# Altium PCB RP2040_PCB.PcbDoc
Units mm, origin at the board's own origin, x right, y up, seen from the top; angles counter-clockwise.
Board outline 57.7 x 53.5 mm, 4 copper layers (Top Layer, GND, Power, Bottom Layer), stack 0.841 mm thick; 30 components, 51 nets, 206 pads, 55 vias.
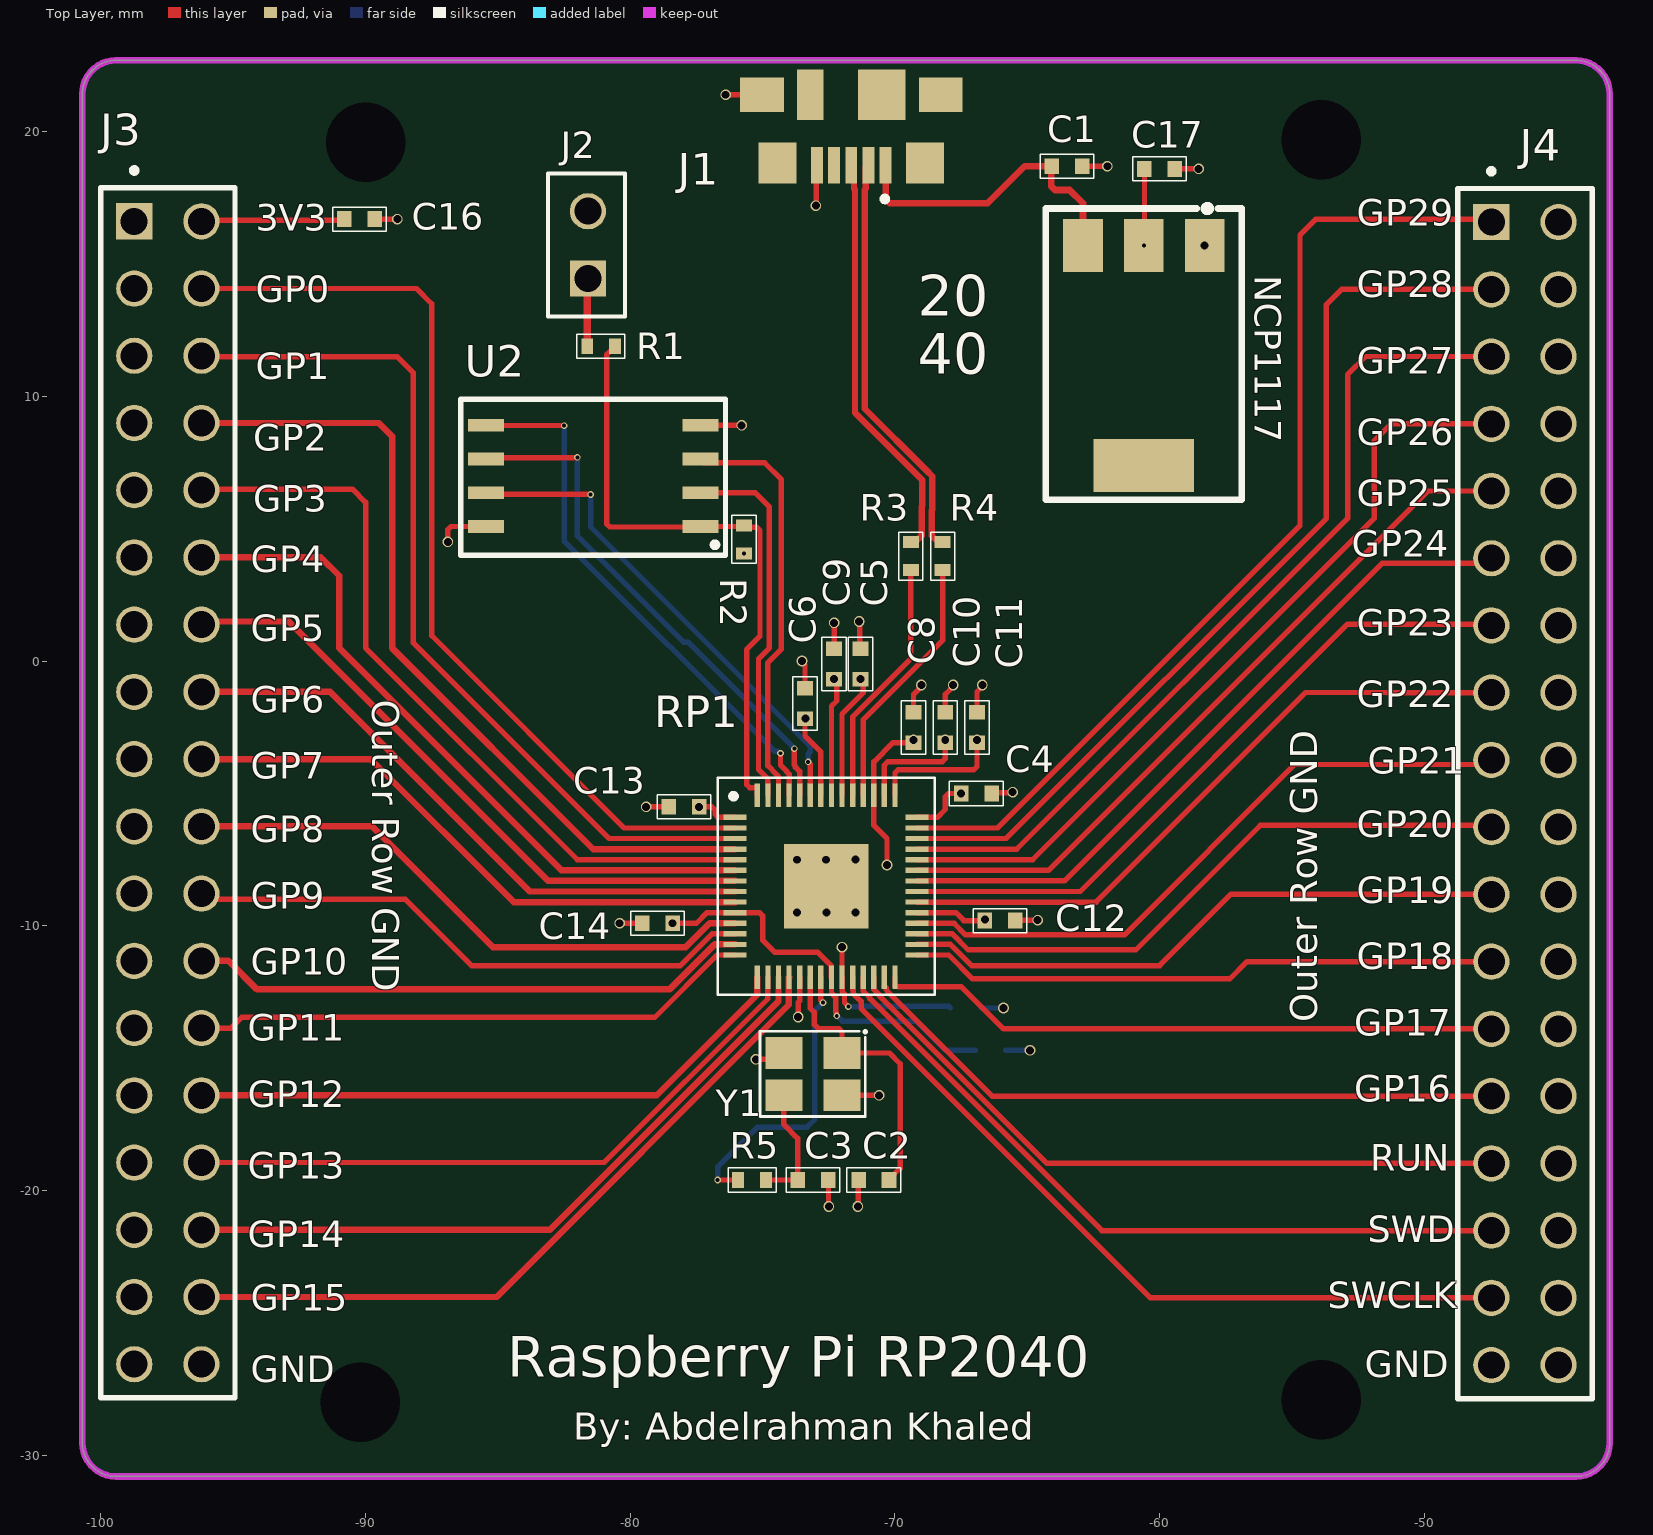
[diagram p0: Top Layer view]
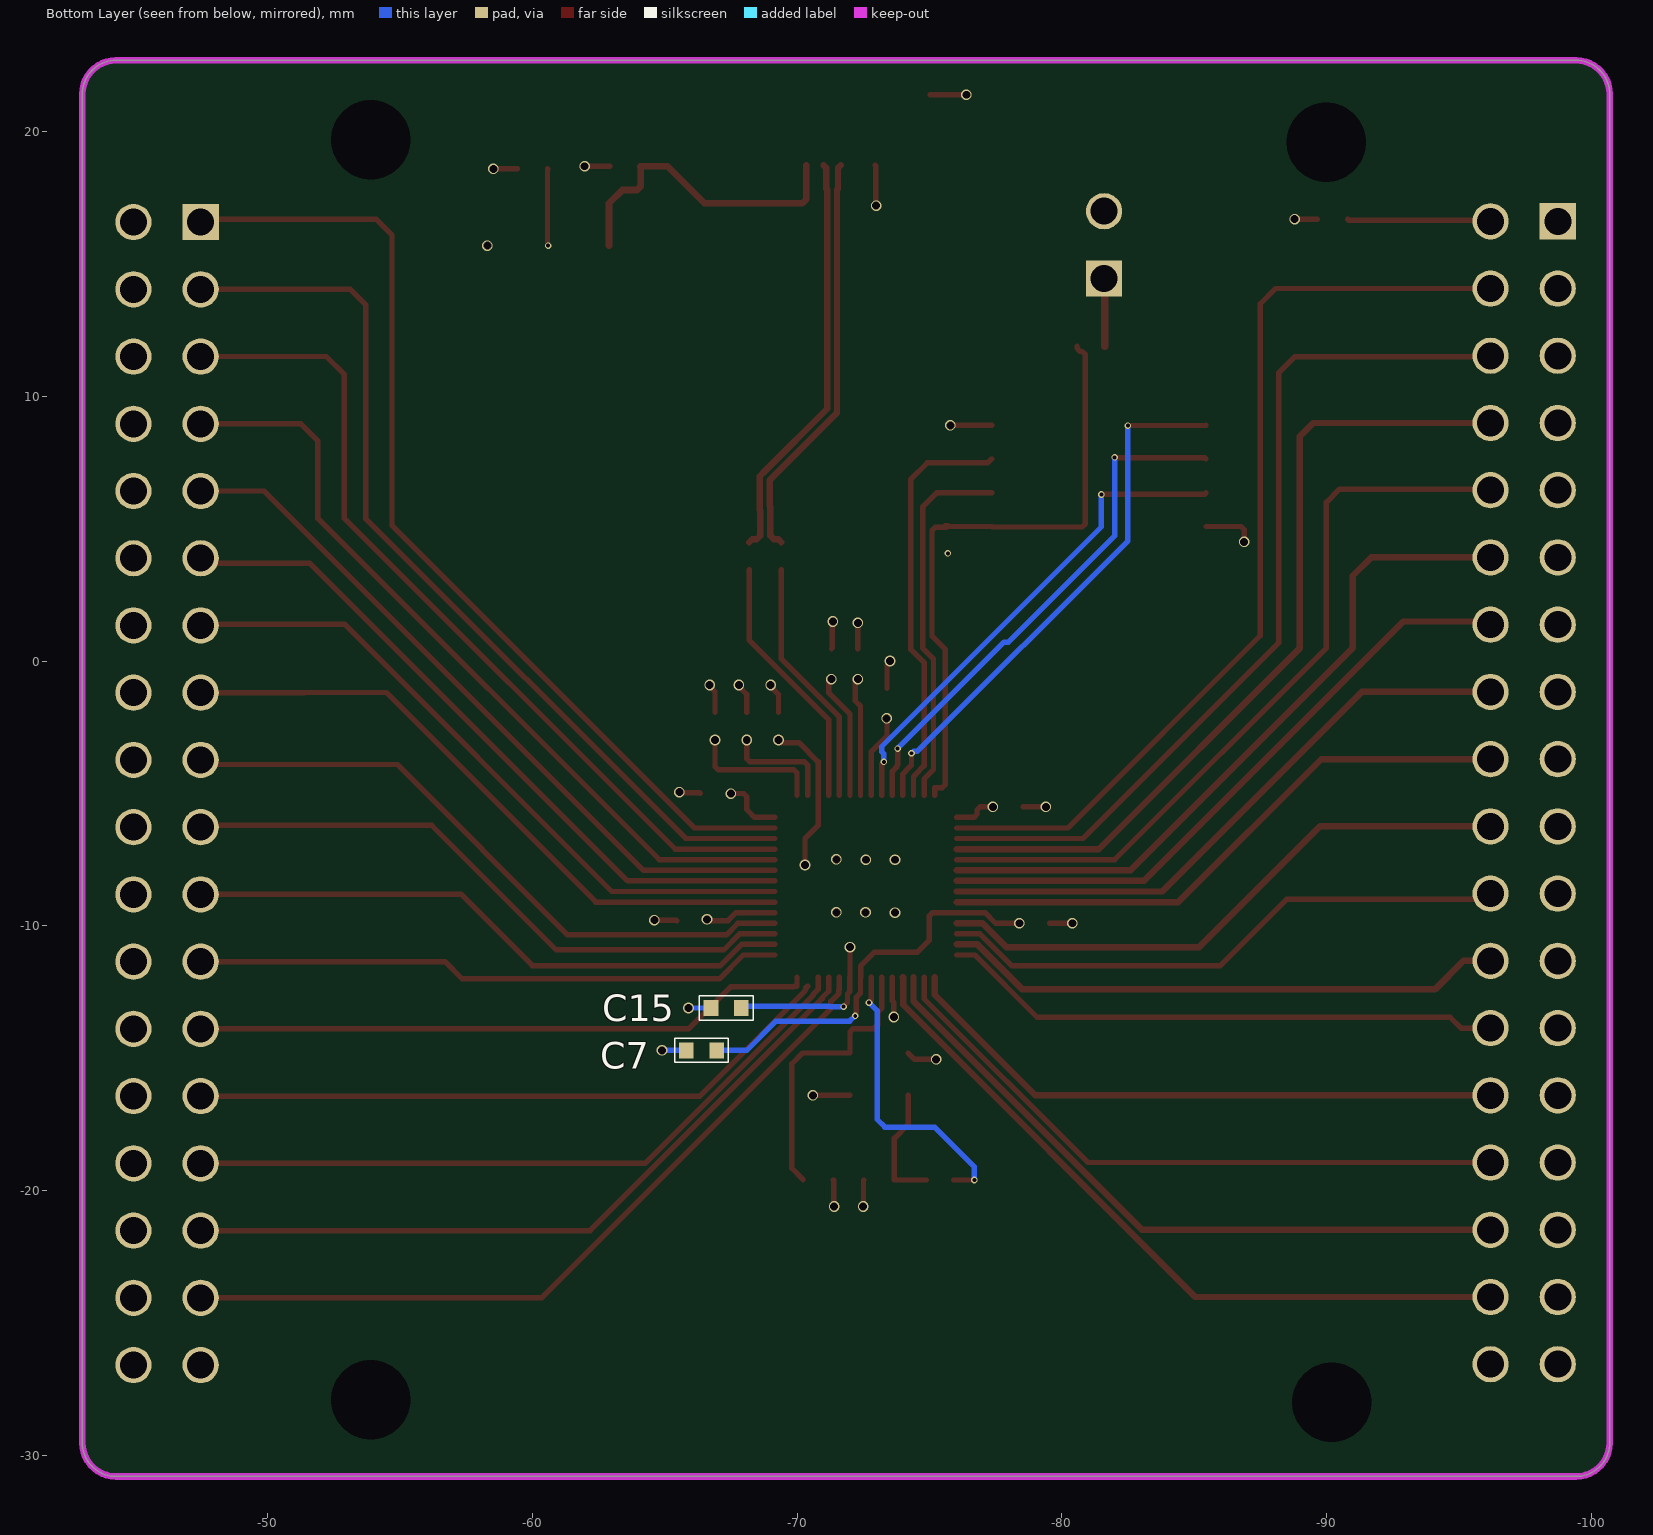
[diagram p1: Bottom Layer view, seen from below]
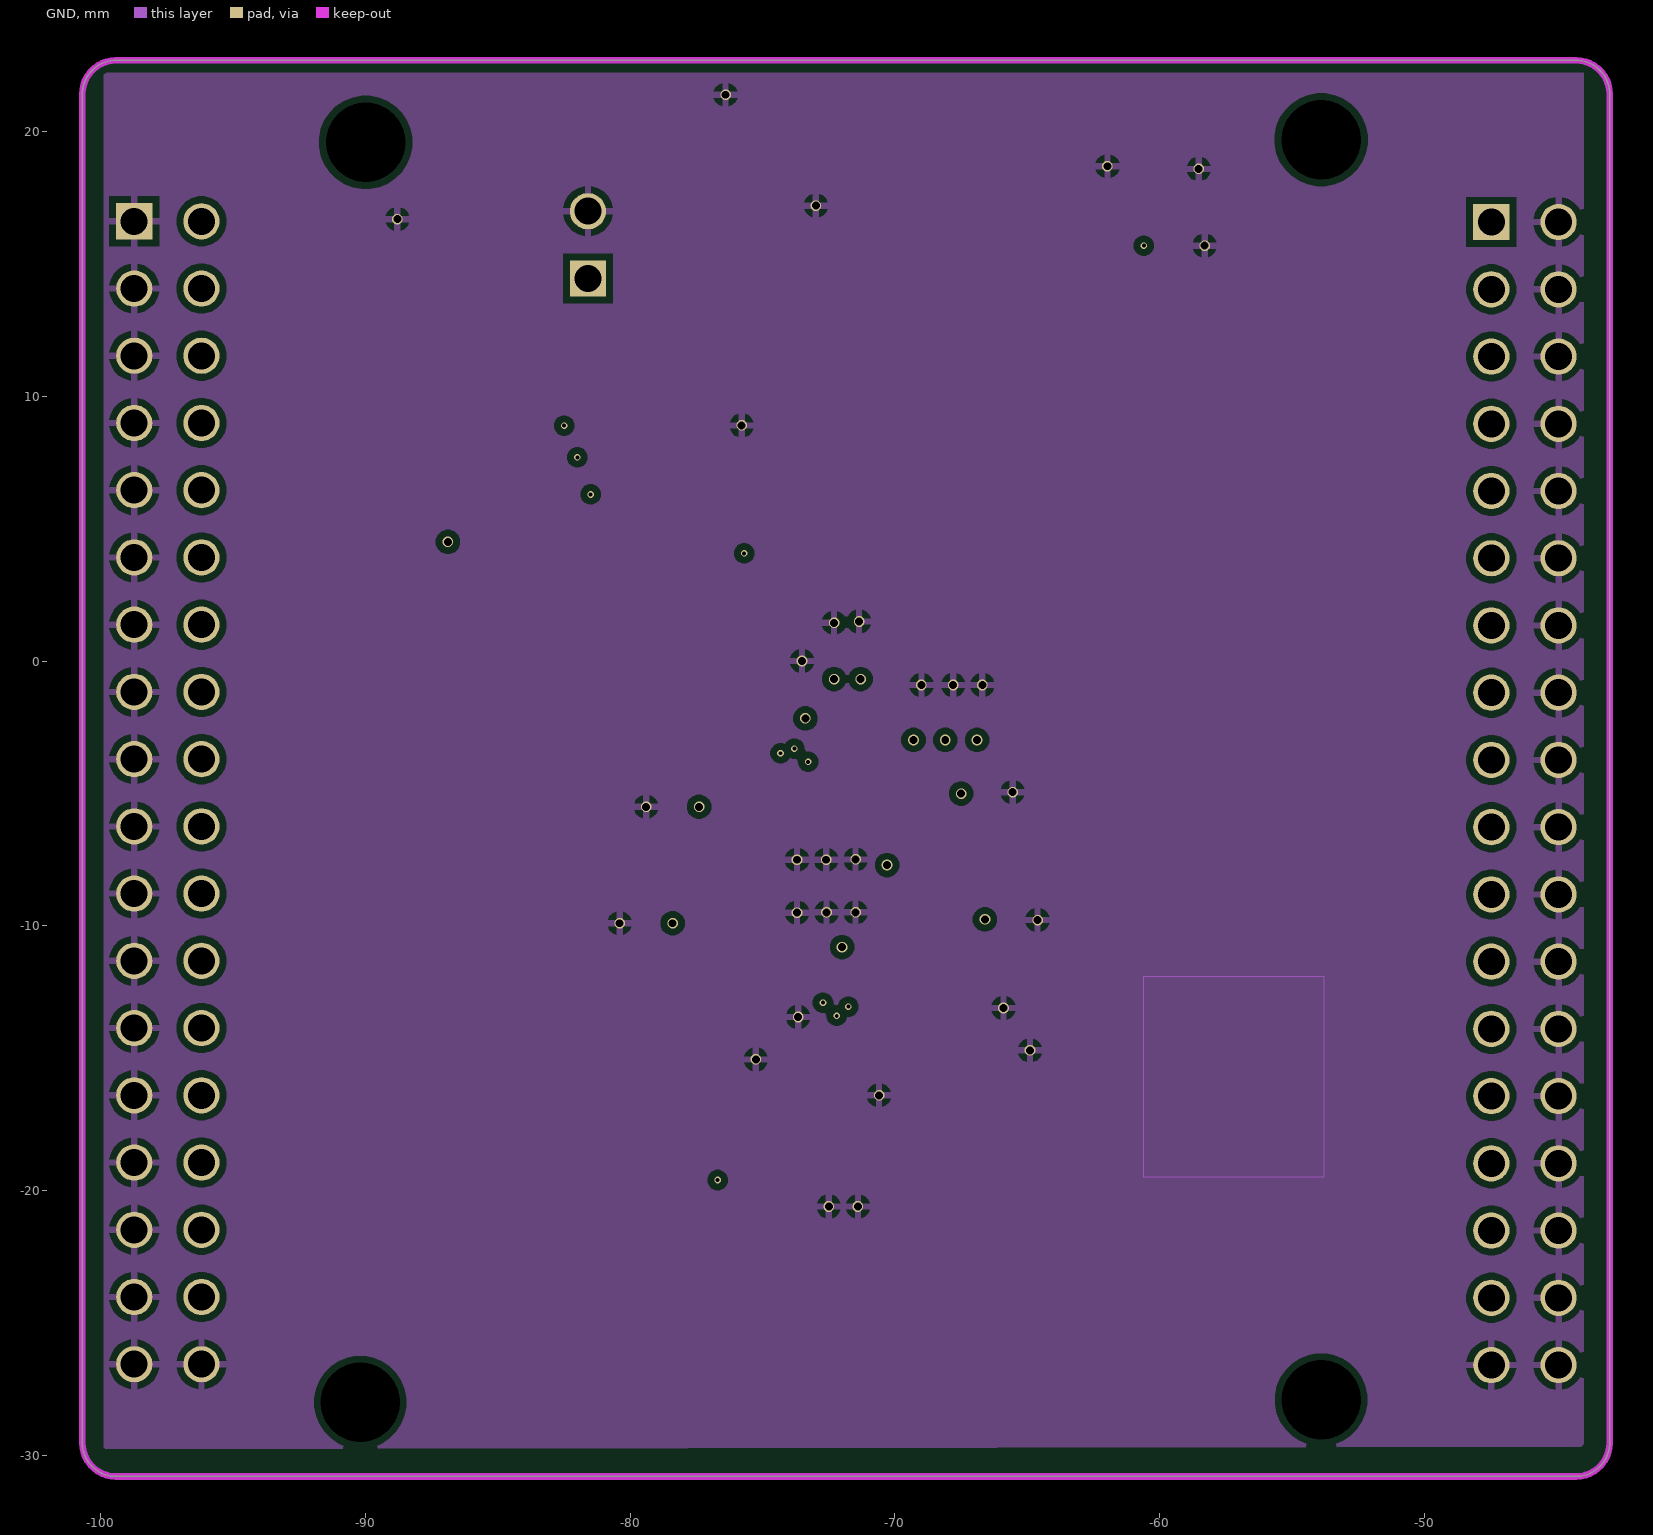
[diagram p2: GND]
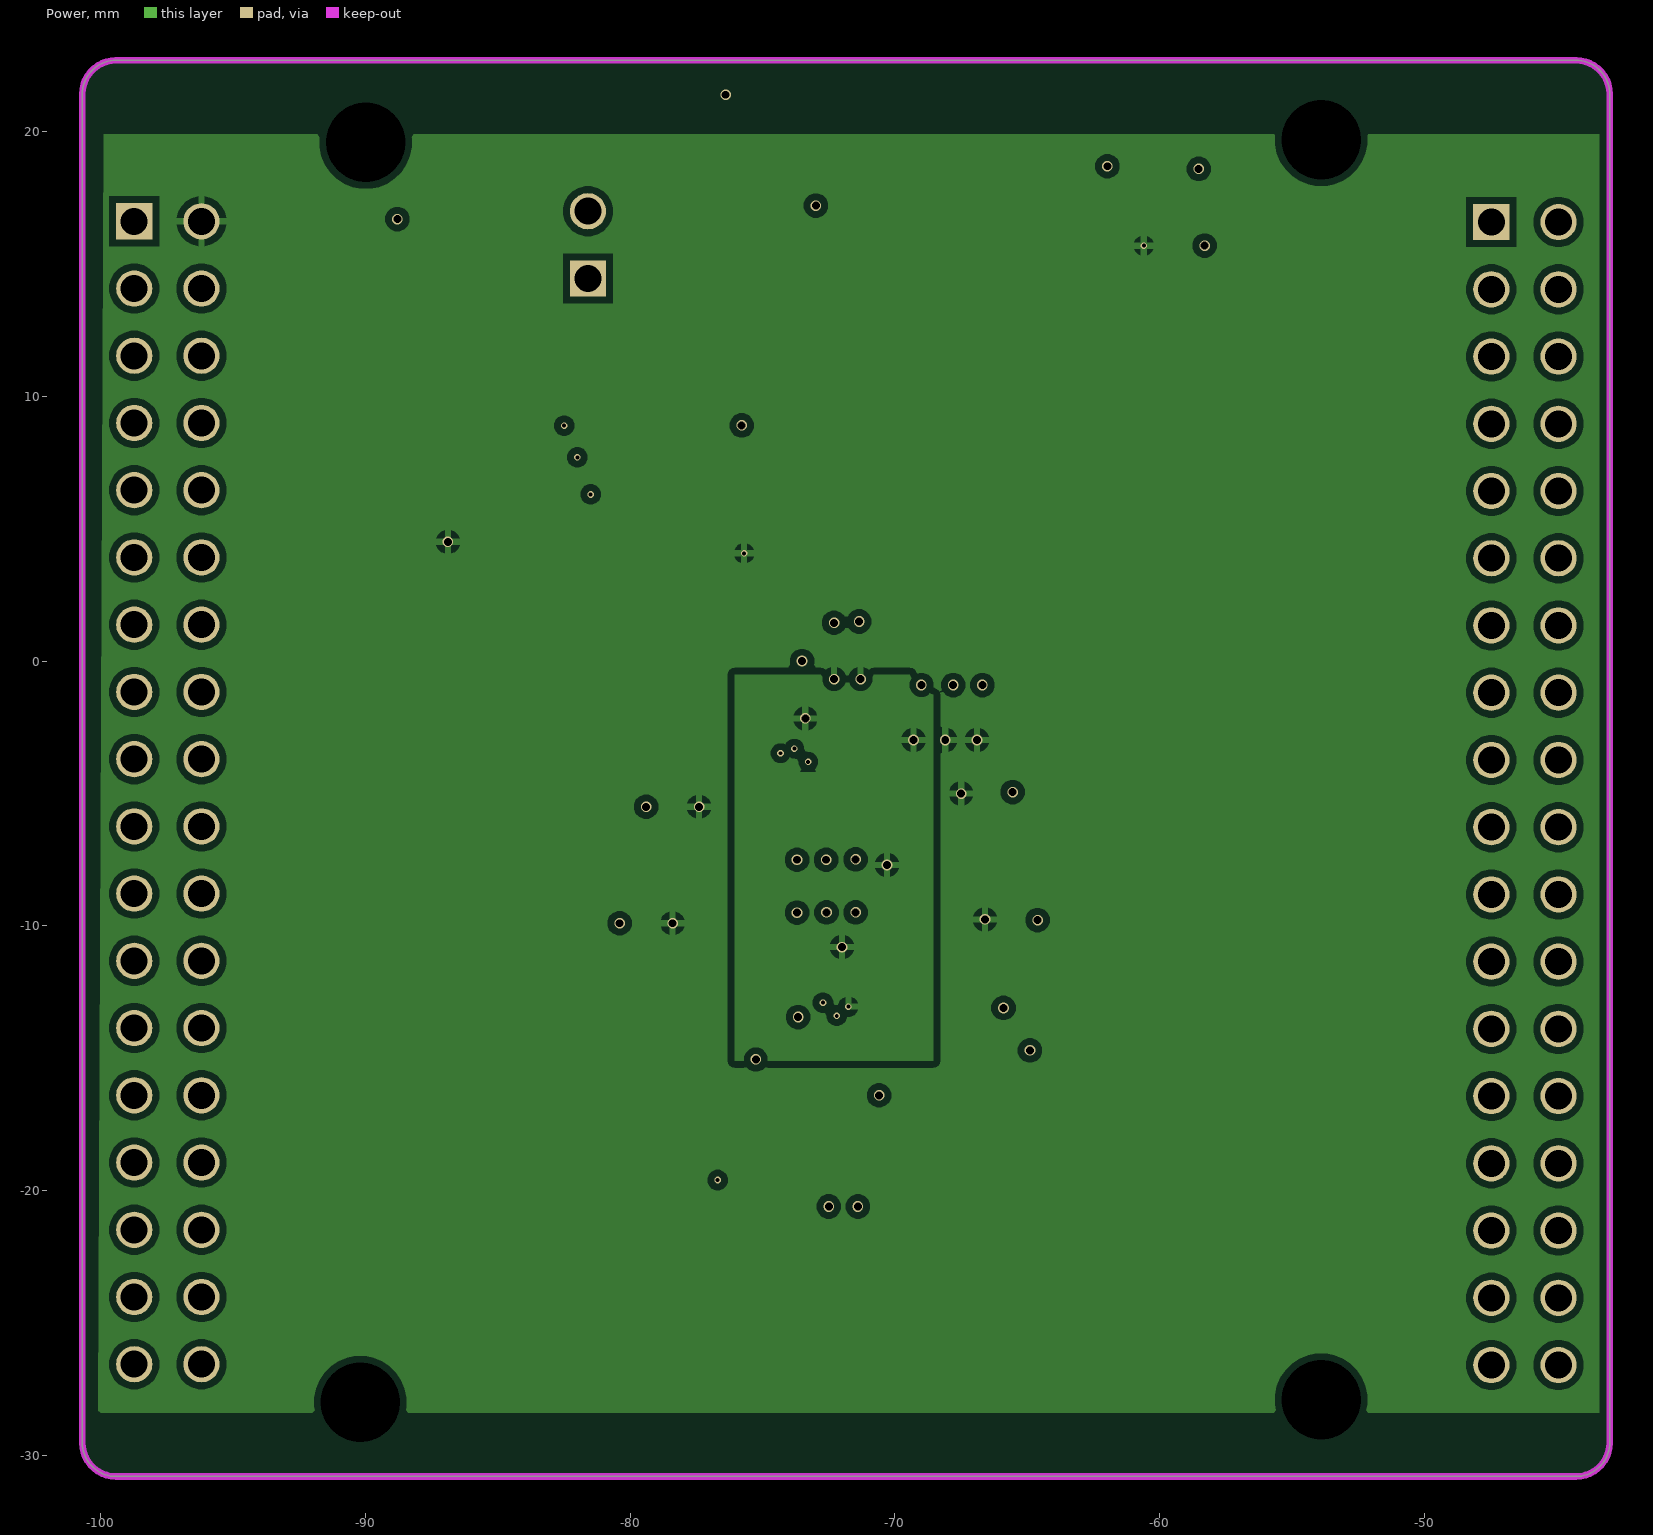
[diagram p3: Power]
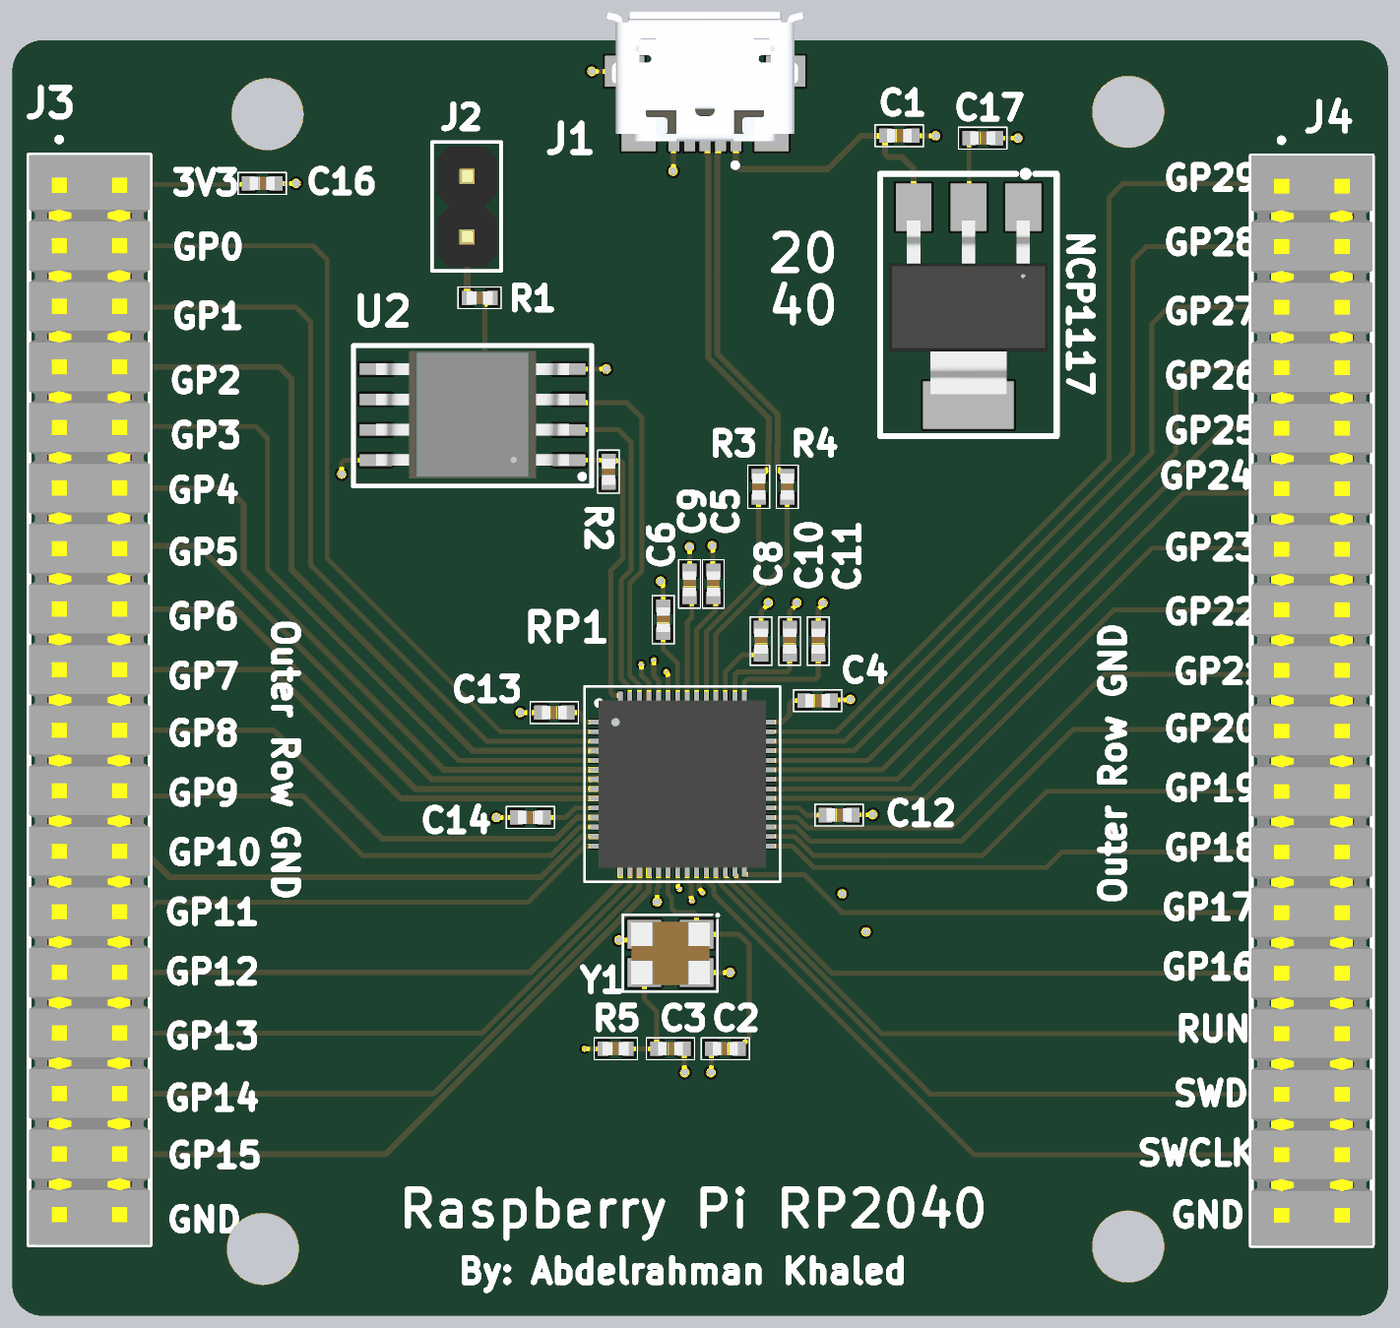
[diagram p4: 3D render of the assembled board from above, using the file's embedded part models]

## Layer stack, top to bottom
Top Solder: solder mask 0.0102, Solder Resist, Dk 3.5
Top Layer: signal copper 0.035
Dielectric 2: prepreg 0.2104, PP-021, Dk 4.4
GND: signal copper 0.0152
Dielectric 1: dielectric 0.32, FR-4, Dk 4.8
Power: signal copper 0.0152
Dielectric 3: prepreg 0.2104, PP-021, Dk 4.4
Bottom Layer: signal copper 0.035
Bottom Solder: solder mask 0.0102, Solder Resist, Dk 3.5

## Board outline
-100.7,-29.53 -100.7,20.2 -100.7,21.43 cw(c-99.43,21.43) -99.43,22.7 -44.27,22.7 cw(c-44.27,21.43) -43,21.43 -43,-29.53 cw(c-44.27,-29.53) -44.27,-30.8 -99.43,-30.8 cw(c-99.43,-29.53)

## Design rules (kind name [scope] priority, off if disabled: settings)
Clearance [All] p1: gap=0.254 ignorepadtopadclearanceinfootprint=FALSE except(0.1: Arc-SMDPad Track-SMDPad; 0.127: Arc-Arc Arc-Track Track-Track; 0.19: SMDPad-SMDPad)
DiffPairsRouting [InDifferentialPairClass('DIF 90')] p1: maxlimit=0.127 minlimit=0.127 mostfreqgap=0.127 toplayer_minwidth=0.243 toplayer_maxwidth=0.243 toplayer_prefwidth=0.243 midlayer1_minwidth=0.142 midlayer1_maxwidth=0.142 midlayer1_prefwidth=0.142 midlayer2_minwidth=0.142 midlayer2_maxwidth=0.142 midlayer2_prefwidth=0.142 bottomlayer_minwidth=0.243 bottomlayer_maxwidth=0.243 bottomlayer_prefwidth=0.243 impedanceprofiledriven=TRUE impedanceprofileid={6ACBEE60-41A3-47DC-9B99-EDC9D00B49B0} impedanceprofilevalue=90.000000 maxuncoupledlength=12.7
HoleSize [All] p1: absolutevalues=TRUE maxlimit=5 minlimit=0.025 maxpercent=80.000 minpercent=20.000
MinimumSolderMaskSliver [All] p1: minsoldermaskwidth=0.1
PolygonConnect [All] p1: connectstyle=Relief reliefconductorwidth=0.254 reliefentries=4 polygonreliefangle="90 Angle" airgapwidth=0.254
RoutingVias [All] p1: holewidth=0.5 width=0.4 viastyle="Through Hole" minholewidth=0.15 minwidth=0.25 maxholewidth=0.6 maxwidth=0.5
SilkToSilkClearance [All] p1: silktosilkclearance=0.154
SilkToSolderMaskClearance [IsPad] p1: minsilkscreentomaskgap=0.1 clearancetoexposedcopper=TRUE
SolderMaskExpansion [All] p1: expansion=0.102 istentingtop=FALSE
Width Width_1 [All] p1: maxlimit=0.3 minlimit=0.1 preferedwidth=0.2 minimp=50.000000 maximp=50.000000 favimp=50.000000
Width USB_Width [InNetClass('DIF 90')] p2: maxlimit=0.254 minlimit=0.254 preferedwidth=0.254
25 further rules are at their usual default settings.

## Classes and differential pairs
differential pair class "DIF 90": USB
net class "DIF 90": USB_N USB_P
component class U_RP2040_Microcontroller: C6 C7 C8 C9 C10 C11 C12 C13 C14 C15 C16 J3 J4 R3 R4 RP1
component class "U_Power and Crystal": C1 C2 C3 J1 NCP1117 R5 Y1
component class "U_Flash Memory": C5 J2 R1 R2 U2
differential pair USB: +USB_P -USB_N

## Components (designator, comment, footprint, x,y, rotation, side; value= is the part's Value field where it differs from the comment)
C1 "10UF Capacitor" "CL21A106KOQNNNE - duplicate" -63.5,18.7 r180 top value=10UF
C2 "CAP CER 15PF 50V" "CAP CER 15PF 50V" -70.8,-19.6 r0 top
C3 "CAP CER 15PF 50V" "CAP CER 15PF 50V" -73.1,-19.6 r180 top
C4 "10UF Capacitor" "CL21A106KOQNNNE - duplicate" -66.925,-5 r180 top value=10UF
C5 "10UF Capacitor" CC0603KRX5R8BB104 -71.3,-0.1 r270 top value=100nF
C6 "100 nF" CC0603KRX5R8BB104 -73.4,-1.6 r270 top value=100nF
C7 "100 nF" CC0603KRX5R8BB104 -67.325,-13.1 r180 bottom value=100nF
C8 "1UF Cap" C0805C105K4RAC7800 -69.3,-2.5 r270 top value=1UF
C9 "100 nF" CC0603KRX5R8BB104 -72.3,-0.1 r270 top value=100nF
C10 "1UF Cap" C0805C105K4RAC7800 -68.1,-2.5 r270 top value=1UF
C11 "100 nF" CC0603KRX5R8BB104 -66.9,-2.5 r270 top value=100nF
C12 "100 nF" CC0603KRX5R8BB104 -66.025,-9.8 r180 top value=100nF
C13 "100 nF" CC0603KRX5R8BB104 -77.975,-5.5 r0 top value=100nF
C14 "100 nF" CC0603KRX5R8BB104 -78.975,-9.9 r0 top value=100nF
C15 "100 nF" CC0603KRX5R8BB104 -66.387,-14.7 r180 bottom value=100nF
C16 "100 nF" CC0603KRX5R8BB104 -90.225,16.7 r180 top value=100nF
C17 "10UF Capacitor" "CL21A106KOQNNNE - duplicate" -60,18.6 r180 top value=10UF
J1 "USB_B Micro" "USB_B Micro" -71.65,20.07 r180 top
J2 "Header 1x2" "Header 1x2" -81.8,15.63 r270 top
J3 "Header 2x18" "Header 2x18" -97.47,-4.97 r270 top
J4 "Header 2x18" "Header 2x18" -46.2,-5 r270 top
NCP1117 "IC REG LINEAR 3.3V 1A SOT223" NCP1117LPST33T3G -60.6,15.7 r180 top
R1 "1 KOhm" RC1206FR-078K06L -81.1,11.9 r0 top
R2 "1 KOhm" RC1206FR-078K06L -75.7,4.6 r270 top
R3 "27.4Ohm" RC1206FR-078K06L -69.4,3.975 r90 top
R4 "27.4Ohm" RC1206FR-078K06L -68.2,3.975 r90 top
R5 "1KOhm" RC1206FR-078K06L -75.4,-19.6 r180 top
RP1 "CortexM0" RaspberryPI2040 -72.6,-8.5 r0 top
U2 "W25Q128JVSIQ" W25Q128JVSIQ-ND -81.4,7 r180 top
Y1 "Crystal 12 MHz" "Crystal 12 MHz" -73.1,-15.6 r180 top

## Footprints (in the part's own frame and the unit in brackets; to place one, negate y for a bottom-side part, rotate by r counter-clockwise, add the part's x,y. Pads: shape width x height; smd on the part's side, far side on the other; paste and mask are expansions set on the pad)
C0805C105K4RAC7800 [mm] "1 µF ±10% 16V Ceramic Capacitor X7R 0805 (2012 Metric)"
  rect 0.55x0.6 smd: 1(-0.575,0) 2(0.575,0)
  silkscreen extent -1.01,-0.46 1.02,0.46, body extent -0.52,-0.28 0.52,0.28, height 0.56
"CAP CER 15PF 50V" [mm] "15 pF ±5% 50V Ceramic Capacitor C0G, NP0 0805 (2012 Metric) (https://www.digikey.com/en/products/detail/yageo/CC0805JRNPO9BN150/302835)"
  rect 0.55x0.6 smd: 1(-0.575,0) 2(0.575,0)
  silkscreen extent -1.01,-0.46 1.02,0.46, body extent -0.52,-0.28 0.52,0.28, height 0.56
CC0603KRX5R8BB104 [mm] "100 nF ±10% 16V Ceramic Capacitor X5R 0805 (2012 Metric)"
  rect 0.55x0.6 smd: 1(-0.575,0) 2(0.575,0)
  silkscreen extent -1.01,-0.46 1.02,0.46, body extent -0.52,-0.28 0.52,0.28, height 0.56
"CL21A106KOQNNNE - duplicate" [mm] "10 µF ±10% 16V Ceramic Capacitor X5R 0805 (2012 Metric)"
  rect 0.55x0.6 smd: 1(-0.575,0) 2(0.575,0)
  silkscreen extent -1.01,-0.46 1.02,0.46, body extent -0.52,-0.28 0.52,0.28, height 0.56
"Crystal 12 MHz" [mm] "12 MHz ±30ppm Crystal 18pF 150 Ohms 4-SMD, No Lead"
  rect 1.4x1.2 smd: 1(-1.1,-0.8) 2(1.1,-0.8) 3(1.1,0.8) 4(-1.1,0.8)
  silkscreen extent -1.98,-1.63 2,1.6, body extent -1.65,-1.32 1.65,1.32, height 0.76
"Header 1x2" [mm]
  rect 1.37x1.37 hole 1.02: 01(1.17,0.2)
  round 1.37 hole 1.02: 02(-1.37,0.2)
  silkscreen extent -2.8,-1.3 2.6,1.6, body extent -2.64,-1.1 2.44,1.44, height 8.54
"Header 2x18" [mm]
  rect 1.37x1.37 hole 1.02: 01(-21.59,-1.27)
  round 1.37 hole 1.02: 02(-21.59,1.27) 03(-19.05,-1.27) 04(-19.05,1.27) 05(-16.51,-1.27) 06(-16.51,1.27) 07(-13.97,-1.27) 08(-13.97,1.27) 09(-11.43,-1.27) 10(-11.43,1.27) 11(-8.89,-1.27) 12(-8.89,1.27) 13(-6.35,-1.27) 14(-6.35,1.27) 15(-3.81,-1.27) 16(-3.81,1.27) 17(-1.27,-1.27) 18(-1.27,1.27) 19(1.27,-1.27) 20(1.27,1.27) 21(3.81,-1.27) 22(3.81,1.27) 23(6.35,-1.27) 24(6.35,1.27) 25(8.89,-1.27) 26(8.89,1.27) 27(11.43,-1.27) 28(11.43,1.27) 29(13.97,-1.27) 30(13.97,1.27) 31(16.51,-1.27) 32(16.51,1.27) 33(19.05,-1.27) 34(19.05,1.27) 35(21.59,-1.27) 36(21.59,1.27)
  silkscreen extent -23.61,-2.54 22.86,2.54, body extent -22.86,-2.54 22.86,2.54, height 7.57
NCP1117LPST33T3G [mm] "https://www.digikey.com/en/products/detail/onsemi/NCP1117LPST33T3G/2194024"
  rect 1.5x2 smd: 1(-2.3,0) 2(0,0) 3(2.3,0)
  rect 3.8x2 smd: GND(0,8.3)
  silkscreen extent -3.7,-1.5 3.7,9.6, body extent -3.34,0.56 3.34,7.84, height 1.73
RaspberryPI2040 [mm] "Design From Datasheet  Page 612 and all Dimensions in mm"
  rect 0.875x0.2 smd mask-2539.97: 1(-3.437,2.6) 2(-3.437,2.2) 3(-3.437,1.8) 4(-3.437,1.4) 5(-3.437,1) 6(-3.437,0.6) 7(-3.437,0.2) 8(-3.437,-0.2) 9(-3.437,-0.6) 10(-3.437,-1) 11(-3.437,-1.4) 12(-3.437,-1.8) 13(-3.437,-2.2) 14(-3.437,-2.6) 29(3.438,-2.6) 30(3.438,-2.2) 31(3.438,-1.8) 32(3.438,-1.4) 33(3.438,-1) 34(3.438,-0.6) 35(3.438,-0.2) 36(3.438,0.2) 37(3.438,0.6) 38(3.438,1) 39(3.438,1.4) 40(3.438,1.8) 41(3.438,2.2) 42(3.438,2.6)
  rect 0.2x0.875 smd mask-2539.97: 15(-2.6,-3.437) 16(-2.2,-3.437) 17(-1.8,-3.437) 18(-1.4,-3.437) 19(-1,-3.437) 20(-0.6,-3.437) 21(-0.2,-3.437) 22(0.2,-3.437) 23(0.6,-3.437) 24(1,-3.437) 25(1.4,-3.437) 26(1.8,-3.437) 27(2.2,-3.437) 28(2.6,-3.437) 43(2.6,3.438) 44(2.2,3.438) 45(1.8,3.438) 46(1.4,3.438) 47(1,3.438) 48(0.6,3.438) 49(0.2,3.438) 50(-0.2,3.438) 51(-0.6,3.438) 52(-1,3.438) 53(-1.4,3.438) 54(-1.8,3.438) 55(-2.2,3.438) 56(-2.6,3.438)
  rect 3.2x3.2 smd mask-2539.97: 57(0,0)
  silkscreen extent -4.1,-4.1 4.1,4.1, body extent -3.5,-3.5 3.5,3.5, height 0.89
RC1206FR-078K06L [mm] "8.06 kOhms ±1% 0.25W, 1/4W Chip Resistor 1206 (3216 Metric) Moisture Resistant Thick Film"
  rect 0.45x0.6 smd: 1(-0.525,0) 2(0.525,0)
  silkscreen extent -0.91,-0.46 0.9,0.46, body extent -0.55,-0.28 0.55,0.28, height 0.36
"USB_B Micro" [mm] "Conn Data USB Micro B w/Flange SMT Bottom Mnt LF"
  rect 0.45x1.38 smd: 1(-1.3,1.33) 2(-0.65,1.33) 3(0,1.33) 4(0.65,1.33) 5(1.3,1.33)
  rect 1.65x1.3 smd: 6(3.375,-1.33) S3(-3.375,-1.33)
  rect 1.425x1.55 smd: S1(-2.788,1.245) S2(2.788,1.245)
  rect 1.8x1.9 smd: S4(-1.15,-1.33)
  rect 1x1.9 smd: S5(1.55,-1.33)
  silkscreen extent -1.37,2.51 -1.17,2.71, body extent -4.18,-3.83 4.18,1.6, height 2.71
W25Q128JVSIQ-ND [mm] "FLASH - NOR Memory IC 128Mbit SPI - Quad I/O, QPI 133 MHz 8-SOIC"
  rect 1.36x0.48 smd: 1(-4.05,1.913) 2(-4.05,0.638) 3(-4.05,-0.637) 4(-4.05,-1.913) 5(4.05,-1.913) 6(4.05,-0.637) 7(4.05,0.638) 8(4.05,1.913)
  silkscreen extent -5,-2.9 5,3, body extent -4.05,-2.67 4.05,2.67, height 2.16

## Part data
C1 C4 C17: library part CL21A106KOQNNNE, "10 µF ±10% 16V Ceramic Capacitor X5R 0805 (2012 Metric)", Link=https://www.digikey.com/en/products/detail/samsung-electro-mechanics/CL21A106KOQNNNE/3886754, Part Number=CL21A106KOQNNNE
C2 C3: "15 pF ±5% 50V Ceramic Capacitor C0G, NP0 0805 (2012 Metric)", Part Number=CC0805JRNPO9BN150, Link=https://www.digikey.com/en/products/detail/yageo/CC0805JRNPO9BN150/302835
C5 C6 C7 C9 C11 C12 C13 C14 C15 C16: library part CC0603KRX5R8BB104, "100 nF ±10% 25V Ceramic Capacitor X5R 0603 (1608 Metric)", Part Number=CL21A106KOQNNNE, Link=https://www.digikey.com/en/products/detail/samsung-electro-mechanics/CL21A106KOQNNNE/3886754, Link1=https://www.digikey.com/en/products/detail/yageo/CC0603KRX5R8BB104/20376210?s=N4IgjCBcoEwAwBYCcVQGMoDMCGAbAzgKYA0IA9lANrhxwAEAdgGIgC6pADgC5QgCqDAJZcA8pgCyhbPgCuAJ0IgAvqQC0ANlQgMkLnJklyVEAGYQpGGyUqQlyNTC1GmOmmwdsaYWTlWgA
C8 C10: library part C0805C105K4RAC7800, "1 µF ±10% 16V Ceramic Capacitor X7R 0805 (2012 Metric)", Link=https://www.digikey.com/en/products/detail/kemet/C0805C105K4RAC7800/416047, Part Number=C0805C105K4RAC7800
J1: "Conn Data USB Micro B w/Flange SMT Bottom Mnt LF", Part Number=47346-0001, Link=https://www.snapeda.com/parts/47346-0001/Molex/view-part/
NCP1117: library part NCP1117LPST33T3G, "Linear Voltage Regulator IC Positive Fixed 1 Output 1A SOT-223", Part Number=NCP1117LPST33T3GOSTR-ND, Link=https://www.digikey.com/en/products/detail/onsemi/NCP1117LPST33T3G/2194024
R1 R2 R3 R4 R5: library part RC1206FR-078K06L, "8.06 kOhms ±1% 0.25W, 1/4W Chip Resistor 1206 (3216 Metric) Moisture Resistant Thick Film", Link=https://www.digikey.com/en/products/detail/yageo/RC1206FR-078K06L/729108, Part Number=RC1206FR-078K06L
RP1: library part RaspberryPI2040, "Microcontrollers connect the world of software to the world of hardware. They allow developers to write software which / interacts with the physical world in the same deterministic, cycle-accurate manner as digital logic. They occupy the / bottom left corner of the price/performance space, outselling their more powerful brethren by a factor of ten to one. / They are the workhorses that power the digital transformation of our world."
U2: "FLASH - NOR Memory IC 128Mbit SPI - Quad I/O, QPI 133 MHz 8-SOIC", Link=https://www.digikey.com/en/products/detail/winbond-electronics/W25Q128JVSIQ/5803943, Part Number=W25Q128JVSIQ
Y1: "12 MHz ±30ppm Crystal 18pF 150 Ohms 4-SMD, No Lead", Part Number=403C35D12M00000, Link=https://www.digikey.com/en/products/detail/cts-frequency-controls/403C35D12M00000/2292747

## Free pads (board coordinates)
  round 1.524 hole 3: H(-90.2,-28) H(-90,19.6) H(-53.9,-27.9) H(-53.9,19.7)

## Via types
v1: diameter 0.4, hole 0.3, Top Layer to Bottom Layer, 43 vias
v2: diameter 0.25, hole 0.15, Top Layer to Bottom Layer, 12 vias

## Nets (pads, with @x,y where several pads share a name; then routed paths per layer and width w, separated by ;. In a path a pad name is that pad's centre, name@x,y a point inside that pad or via, vN(x,y) a via of type N, cw(c..) or ccw(c..) an arc to the next point about the centre after c; other vN are vias at no path point)
+1V1: C6.2 C7.2 C8.2 RP1.23 RP1.45 RP1.50 | length 15.3
  Top Layer w0.203: C6.2 -73.4,-2.825 -72.8,-3.425 RP1.50 ; v1(-72,-10.8) RP1.23 -71.998,-11.939 -71.998,-12.474 -71.909,-12.564 -71.909,-12.886 -71.758,-13.037 v2(-71.758,-13.049) ; v1(-70.3,-7.7) -70.3,-6.7 -70.8,-6.2 RP1.45 -70.798,-5.061 -70.798,-3.8 -70.073,-3.075 -69.4,-3.075 v1(-69.3,-2.975)
  Bottom Layer w0.203: v2(-71.758,-13.049) -71.245,-13.049 -71.227,-13.031 -67.969,-13.031 C7.2
  other v1: -73.387,-2.162
+3V3: C4.2 C5.2 C9.2 C10.2 C11.2 C12.2 C13.2 C14.2 C15.2 C16.2 C17.2 J3.02 NCP1117.2 R2.2 RP1.1 RP1.10 RP1.22 RP1.33 RP1.42 RP1.43 RP1.44 RP1.48 RP1.49 U2.8 | length 50.7
  Top Layer w0.203: J3.02 -96.16,16.66 -90.84,16.66 C16.2 ; v1(-86.89,4.51) -86.89,4.968 -86.771,5.087 U2.8 ; v1(-78.4,-9.9) -77.5,-9.9 -77.1,-9.5 RP1.10 -75.119,-9.5 -75,-9.619 -75,-10.537 -74.537,-11 -72.915,-11 -72.402,-11.513 -72.402,-11.936 -72.398,-11.939 -72.398,-12.541 -72.239,-12.701 -72.239,-13.248 -72.209,-13.278 -72.209,-13.391 v2(-72.2,-13.4) ; v1(-77.4,-5.5) -76.919,-5.5 -76.8,-5.619 -76.8,-5.781 -76.681,-5.9 RP1.1 ; RP1.49 -72.4,-1.7 -72.2,-1.5 C9.2@-72.2,-0.675 ; RP1.48 -72,-2 -71.2,-1.2 C5.2@-71.2,-0.675 ; RP1.44 -70.4,-3.919 -70.281,-3.8 -68.219,-3.8 -68.1,-3.681 C10.2 v1(-68.1,-2.975) ; RP1.43 -70,-4.219 -69.881,-4.1 -67.019,-4.1 -66.9,-3.981 C11.2 v1(-66.9,-2.975) ; RP1.33 -67.7,-9.5 -67.4,-9.8 -66.644,-9.8 v1(-66.6,-9.756) ; RP1.42 -68.4,-5.9 -68.1,-5.6 -68.1,-5.119 -67.981,-5 v1(-67.5,-5) ; v2(-60.6,15.7) -60.575,15.725 C17.2 C17.2@-60.588,18.587
  Bottom Layer w0.203: v2(-72.2,-13.4) -72.187,-13.4 -71.987,-13.6 -69.2,-13.6 -68.1,-14.7 C15.2
  other v1: -72.3,-0.675 -71.3,-0.675
  other v2: -75.7,4.075
GND: C1.1 C2.1 C3.1 C4.1 C5.1 C6.1 C7.1 C8.1 C9.1 C10.1 C11.1 C12.1 C13.1 C14.1 C15.1 C16.1 C17.1 J1.5 J1.6 J2.02 J3.01 J3.03 J3.05 J3.07 J3.09 J3.11 J3.13 J3.15 J3.17 J3.19 J3.21 J3.23 J3.25 J3.27 J3.29 J3.31 J3.33 J3.35 J3.36 J4.02 J4.04 J4.06 J4.08 J4.10 J4.12 J4.14 J4.16 J4.18 J4.20 J4.22 J4.24 J4.26 J4.28 J4.30 J4.32 J4.34 J4.35 J4.36 NCP1117.1 RP1.19 RP1.57 U2.4 Y1.2 Y1.4 | length 25.1
  Top Layer w0.203: C16.1 v1(-88.8,16.7) ; v1(-80.4,-9.9) C14.1 ; v1(-79.4,-5.5) C13.1 ; U2.4 U2.4 -75.791,8.911 v1(-75.79,8.91) ; v1(-76.4,21.4) J1.6 ; v1(-75.257,-15.043) -74.443,-15.043 Y1.2 ; v1(-73.657,-13.443) -73.657,-12.894 -73.6,-12.836 RP1.19 ; v1(-73.511,0.007) -73.511,-0.046 -73.4,-0.157 C6.1 ; v1(-72.99,17.21) -72.97,17.23 -72.97,18.72 J1.5 ; C3.1 -72.512,-19.613 -72.512,-20.588 v1(-72.5,-20.6) ; C9.1 v1(-72.3,1.452) ; Y1.4 v1(-70.6,-16.4) ; v1(-71.4,-20.6) -71.388,-20.588 -71.388,-19.612 C2.1 ; v1(-71.354,1.5) -71.327,1.473 -71.327,0.502 C5.1 ; C8.1 -69.3,-1.253 -69,-0.953 v1(-69,-0.9) ; C10.1 -68.1,-1.253 -67.8,-0.953 v1(-67.8,-0.9) ; C11.1 -66.9,-1.153 -66.7,-0.953 v1(-66.7,-0.9) ; C4.1 -66.323,-4.973 -65.58,-4.973 v1(-65.554,-4.947) ; C12.1 -65.44,-9.79 -64.622,-9.79 v1(-64.612,-9.78) ; C1.1 v1(-61.975,18.7) ; C17.1 v1(-58.525,18.6)
  Bottom Layer w0.203: C7.1 v1(-65.9,-13.1) ; C15.1 v1(-64.9,-14.7) ; v1@-64.96,-14.76 v1@-64.84,-14.64
  other v1: -73.7,-9.5 -72.587,-9.487 -71.487,-9.487 -73.7,-7.5 -72.6,-7.5 -71.487,-7.487 -58.3,15.7
GPIO0: J3.04 RP1.2 | length 35.9
  Top Layer w0.203: J3.04 -88.08,14.08 -87.5,13.5 -87.5,0.967 -80.233,-6.3 RP1.2
GPIO1: J3.06 RP1.3 | length 33.7
  Top Layer w0.203: J3.06 -96.16,11.5 -88.8,11.5 -88.2,10.9 -88.2,0.7 -80.8,-6.7 RP1.3
GPIO2: J3.08 RP1.4 | length 31.5
  Top Layer w0.243: J3.08 -89.5,9 -89,8.5 -89,0.5 -81.4,-7.1 RP1.4
GPIO3: J3.10 RP1.5 | length 29.2
  Top Layer w0.203: J3.10 -96.16,6.5 -90.5,6.5 -90,6 -90,0.5 -82,-7.5 RP1.5
GPIO4: J3.12 RP1.6 | length 26.7
  Top Layer w0.243: J3.12 -91.695,3.92 -91,3.225 -91,0.5 -82.6,-7.9 RP1.6
GPIO5: J3.14 RP1.7 | length 24.3
  Top Layer w0.243: J3.14 -96.08,1.5 -92.9,1.5 -83.1,-8.3 RP1.7
GPIO6: J3.16 RP1.8 | length 23.3
  Top Layer w0.243: J3.16 -91.34,-1.16 -83.8,-8.7 RP1.8
GPIO7: J3.18 RP1.9 | length 22.4
  Top Layer w0.243: J3.18 -89.8,-3.7 -84.4,-9.1 RP1.9
GPIO8: J3.20 RP1.11 | length 22.4
  Top Layer w0.243: J3.20 -89.76,-6.24 -85.2,-10.8 -77.904,-10.8 -77.005,-9.9 RP1.11
GPIO9: J3.22 RP1.12 | length 21.8
  Top Layer w0.203: J3.22 -95.98,-9 -88.5,-9 -86,-11.5 -78.11,-11.5 -76.91,-10.3 RP1.12
GPIO10: J3.24 RP1.13 | length 21.3
  Top Layer w0.243: J3.24 -95.18,-11.32 -94.1,-12.4 -78.514,-12.4 -76.814,-10.7 RP1.13
GPIO11: J3.26 RP1.14 | length 21.3
  Top Layer w0.203: J3.26 -95.085,-13.86 -94.675,-13.45 -79.069,-13.45 -76.719,-11.1 RP1.14
GPIO12: J3.28 RP1.15 | length 23.2
  Top Layer w0.243: J3.28 -79,-16.4 -75.2,-12.6 RP1.15
GPIO13: J3.30 RP1.16 | length 24.8
  Top Layer w0.203: J3.30 -80.987,-18.94 -74.8,-12.753 RP1.16
GPIO14: J3.32 RP1.17 | length 26.3
  Top Layer w0.243: J3.32 -83.032,-21.48 -74.4,-12.848 RP1.17
GPIO15: J3.34 RP1.18 | length 27.8
  Top Layer w0.243: J3.34 -85.049,-24.02 -74.007,-12.979 -74.007,-11.945 RP1.18
GPIO16: J4.27 RP1.27 | length 24.7
  Top Layer w0.203: RP1.27@-70.398,-12.273 -70.33,-12.342 -70.33,-12.397 -70.302,-12.425 -70.302,-12.459 -66.33,-16.43 J4.27
GPIO17: J4.25 RP1.28 | length 23.5
  Top Layer w0.203: RP1.28 -70,-12.272 -69.998,-12.273 -69.908,-12.273 -69.881,-12.3 -67.486,-12.3 -65.896,-13.89 J4.25
GPIO18: J4.23 RP1.29 | length 22.3
  Top Layer w0.203: RP1.29 -67.968,-11.1 -67.068,-12 -57.352,-12 -56.702,-11.35 J4.23
GPIO19: J4.21 RP1.30 | length 23.1
  Top Layer w0.203: RP1.30 -67.901,-10.7 -67.101,-11.5 -60,-11.5 -57.3,-8.8 -47.48,-8.8 J4.21
GPIO20: J4.19 RP1.31 | length 23.9
  Top Layer w0.203: RP1.31 -67.834,-10.3 -67.234,-10.9 -60.9,-10.9 -56.2,-6.2 -47.54,-6.2 J4.19
GPIO21: J4.17 RP1.32 | length 24.6
  Top Layer w0.203: RP1.32 -67.767,-9.9 -67.331,-10.336 -61.336,-10.336 -54.9,-3.9 -47.64,-3.9 J4.17
GPIO22: J4.15 RP1.34 | length 25
  Top Layer w0.203: RP1.34 -62.4,-9.1 -54.484,-1.184 -51.399,-1.184 -51.394,-1.19 J4.15
GPIO23: J4.13 RP1.35 | length 25.9
  Top Layer w0.203: RP1.35 -63,-8.7 -52.9,1.4 -47.52,1.4 J4.13
GPIO24: J4.11 RP1.36 | length 26.7
  Top Layer w0.203: RP1.36 -63.6,-8.3 -51.6,3.7 -47.66,3.7 J4.11
GPIO25: J4.09 RP1.37 | length 27.6
  Top Layer w0.203: RP1.37 -64.2,-7.9 -49.87,6.43 J4.09
GPIO26_ADC0: J4.07 RP1.38 | length 30.2
  Top Layer w0.203: RP1.38 -64.8,-7.5 -51.9,5.4 -51.9,8.325 -51.255,8.97 J4.07
GPIO27_ADC1: J4.05 RP1.39 | length 32.6
  Top Layer w0.203: RP1.39 -65.4,-7.1 -52.9,5.4 -52.9,10.825 -52.215,11.51 J4.05
GPIO28_ADC2: J4.03 RP1.40 | length 35
  Top Layer w0.203: RP1.40 -65.8,-6.7 -53.7,5.4 -53.7,13.475 -53.125,14.05 J4.03
GPIO29_ADC3: J4.01 RP1.41 | length 37.7
  Top Layer w0.203: RP1.41 -66.121,-6.3 -54.7,5.121 -54.7,16.1 -54.1,16.7 -47.58,16.7 J4.01
NetC3_2: C3.2 R5.1 Y1.3 | length 4.6
  Top Layer w0.203: R5.1 C3.2 -73.675,-18.025 -74.2,-17.5 Y1.3
NetJ2_01: J2.01 R1.1 | length 2.6
  Top Layer w0.3: R1.1 -81.625,14.435 J2.01
NetR3_1: R3.1 RP1.47 | length 9.4
  Top Layer w0.203: RP1.47 -71.6,-2.103 -69.4,0.097 R3.1
NetR4_1: R4.1 RP1.46 | length 9.8
  Top Layer w0.203: RP1.46 -71.2,-2.214 -68.2,0.786 R4.1
QSPI_SCLK: RP1.52 U2.6 | length 19.8
  Top Layer w0.203: U2.6 -85.396,7.691 -82.009,7.691 v2(-82,7.7) ; v2(-73.8,-3.3) -73.8,-3.92 -73.761,-3.958 -73.761,-3.999 -73.6,-4.16 RP1.52
  Bottom Layer w0.203: v2(-82,7.7) -82,4.729 -77.99,0.719 -77.819,0.719 v2(-73.8,-3.3)
QSPI_SD0: RP1.53 U2.5 | length 20.5
  Top Layer w0.203: U2.5 -85.444,8.906 -82.506,8.906 v2(-82.5,8.9) ; v2(-74.323,-3.477) -74.323,-3.928 -74.114,-4.137 -74.114,-4.145 -74,-4.26 RP1.53
  Bottom Layer w0.203: v2(-82.5,8.9) -82.5,4.548 -74.552,-3.4 -74.413,-3.4 -74.336,-3.477 v2(-74.323,-3.477)
QSPI_SD1: RP1.55 U2.2 | length 14
  Top Layer w0.203: U2.2 -75.276,6.362 -74.745,5.831 -74.745,0.502 -75.157,0.09 -75.157,-4.093 -74.802,-4.448 -74.802,-5.061 RP1.55
QSPI_SD2: RP1.54 U2.3 | length 15.7
  Top Layer w0.203: U2.3 -77.212,7.499 -76.654,7.499 -76.653,7.498 -74.923,7.498 -74.292,6.866 -74.292,0.456 -74.804,-0.056 -74.804,-3.946 -74.468,-4.283 -74.468,-4.292 -74.4,-4.359 RP1.54
QSPI_SD3: RP1.51 U2.7 | length 18.8
  Top Layer w0.203: U2.7 -85.396,6.309 -81.509,6.309 v2(-81.5,6.3) ; v2(-73.281,-3.8) -73.281,-3.813 -73.2,-3.893 RP1.51
  Bottom Layer w0.203: v2(-81.5,6.3) -81.5,5.08 -73.2,-3.22 -73.2,-3.424 -73.272,-3.495 -73.272,-3.791 v2(-73.281,-3.8)
QSPI_SS: R1.2 R2.1 RP1.56 U2.1 | length 23.5
  Top Layer w0.203: R1.2 -80.575,11.825 -80.698,11.702 -80.772,11.702 -80.891,11.583 -80.891,5.189 -80.772,5.07 -77.368,5.07 U2.1 ; U2.1@-77.349,5.088 -75.637,5.088 R2.1@-75.6,5.125 ; R2.1 -75.633,5.058 -75.217,5.058 -75.098,4.939 -75.098,0.947 -75.601,0.444 -75.601,-4.661 -75.482,-4.78 -75.202,-4.78 -75.2,-4.782 RP1.56
RUN: J4.29 RP1.26 | length 26.5
  Top Layer w0.203: RP1.26 -70.798,-11.939 -70.798,-12.395 -70.617,-12.577 -70.617,-12.61 -64.257,-18.97 J4.29
SWCLK: J4.33 RP1.24 | length 29.7
  Top Layer w0.203: RP1.24 -71.598,-11.939 -71.598,-12.407 -71.578,-12.427 -71.578,-12.549 -71.278,-12.85 -71.278,-13.122 -60.35,-24.05 J4.33
SWD: J4.31 RP1.25 | length 28
  Top Layer w0.203: RP1.25 -71.198,-11.939 -71.198,-12.462 -70.947,-12.713 -70.947,-12.747 -62.184,-21.51 J4.31
USB_N: J1.2 R4.2 | length 15.6
  Top Layer w0.243: J1.2 -71.103,18.637 -71.103,17.856 -71.14,17.819 -71.14,9.54 -68.808,7.208 -68.592,6.992 -68.592,5.713 -68.615,5.689 -68.615,4.746 -68.472,4.603 -68.303,4.603 R4.2
USB_P: J1.3 R3.2 | length 15.6
  Top Layer w0.243: J1.3 -71.547,18.637 -71.547,17.856 -71.51,17.819 -71.51,9.387 -68.962,6.838 -68.962,5.866 -68.985,5.843 -68.985,4.746 -69.128,4.603 -69.297,4.603 R3.2
VBUS: C1.2 J1.1 NCP1117.3 | length 12
  Top Layer w0.254: J1.1 -70.35,17.45 -70.2,17.3 -66.5,17.3 -65.1,18.7 C1.2 -64.1,18.675 -64.1,17.949 -63.951,17.8 -63.4,17.8 -62.9,17.3 NCP1117.3
XIN: C2.2 RP1.20 Y1.1 | length 10.7
  Top Layer w0.203: RP1.20 -73.2,-13.114 -73.047,-13.267 -73.047,-13.728 -72.894,-13.881 -72.119,-13.881 -72,-14 Y1.1 -70.214,-14.8 -69.8,-15.214 -69.8,-19.15 -70.225,-19.575 C2.2
XOUT: R5.2 RP1.21 | length 11.2
  Top Layer w0.203: v2(-76.7,-19.6) R5.2 ; RP1.21 -72.8,-12.807 -72.719,-12.887 v2(-72.719,-12.9)
  Bottom Layer w0.203: v2(-76.7,-19.6) -76.7,-19.1 -75.2,-17.6 -73.319,-17.6 -73.024,-17.305 -73.024,-13.204 v2(-72.719,-12.9)
pads on no net: J1.4 J1.S1 J1.S2 J1.S3 J1.S4 J1.S5 NCP1117.GND

## Polygon pours and split planes (outlines as drawn)
GND on GND "GND_L02_P000" (solid, pour order 0): -99.901,-29.777 -99.901,22.223 -43.985,22.223 -43.985,-29.582 cw(c-43.984,-29.66) -44.061,-29.672
+1V1 on GND "+1V1_L02_P018" (solid, pour order 18): -60.6,-11.9 -53.8,-11.9 -53.8,-19.5 -60.6,-19.5
+1V1 on Power "+1V1_L03_P008" (solid, pour order 8): -76.05,-0.513 -68.55,-0.513 -68.55,-4.2 -76.05,-4.2
+3V3 on Power "+3V3_L03_P013" (solid, pour order 13): -99.9,19.9 -43.4,19.9 -43.4,-28.4 -100.1,-28.4
+1V1 on Power "+1V1_L03_P009" (solid, pour order 9): -76.05,-4.2 -68.55,-4.2 -68.55,-15.1 -76.05,-15.1

## Keep-outs
Keep-Out Layer:
  the board outline again, w0.254

## Silkscreen, mask and mechanical layers (free items; w line width, h text height)
Top Overlay:
  text "GP29" at -52.546,16.454 h1
  text "3V3" at -94.146,16.254 h1
  text "GP28" at -52.546,13.754 h1
  text "GP0" at -94.146,13.554 h1
  text "20" at -69.146,13.054 h1.52
  text "40" at -69.146,10.854 h1.52
  text "GP27" at -52.546,10.854 h1
  text "GP1" at -94.146,10.654 h1
  text "GP26" at -52.546,8.154 h1
  text "GP2" at -94.246,7.954 h1
  text "GP25" at -52.546,5.854 h1
  text "GP3" at -94.246,5.654 h1
  text "GP24" at -52.746,3.954 h1
  text "GP4" at -94.346,3.354 h1
  text "GP23" at -52.546,0.954 h1
  text "GP5" at -94.346,0.754 h1
  text "Outer Row GND" at -89.746,-1.454 h1.02 r270
  text "GP22" at -52.546,-1.746 h1
  text "GP6" at -94.346,-1.946 h1
  text "GP21" at -52.146,-4.246 h1
  text "GP7" at -94.346,-4.446 h1
  text "GP20" at -52.546,-6.646 h1
  text "GP8" at -94.346,-6.846 h1
  text "GP19" at -52.546,-9.146 h1
  text "GP9" at -94.346,-9.346 h1
  text "GP18" at -52.546,-11.646 h1
  text "GP10" at -94.346,-11.846 h1
  text "Outer Row GND" at -54.054,-13.646 h1.02 r90
  text "GP17" at -52.646,-14.146 h1
  text "GP11" at -94.446,-14.346 h1
  text "GP16" at -52.646,-16.646 h1
  text "GP12" at -94.446,-16.846 h1
  text "RUN" at -52.046,-19.246 h1
  text "GP13" at -94.446,-19.546 h1
  text "SWD" at -52.146,-21.946 h1
  text "GP14" at -94.446,-22.146 h1
  text "SWCLK" at -53.646,-24.446 h1
  text "GP15" at -94.346,-24.546 h1
  text "Raspberry Pi RP2040" at -84.646,-27.038 h1.52
  text "GND" at -52.246,-27.046 h1
  text "GND" at -94.346,-27.246 h1
  text "By: Abdelrahman Khaled" at -82.146,-29.407 h1.02